# Altium PCB x-IMU3-SA-Haptic.PcbDoc
Units mm, origin at the board's own origin, x right, y up, seen from the top; angles counter-clockwise.
Board outline 19 x 14 mm, 4 copper layers (Top Layer, Int1 (GND), Int2 (PWR), Bottom Layer), stack 1.369 mm thick; 18 components, 15 nets, 69 pads, 19 vias.
Unrouted connection lines stored in the file: 5.
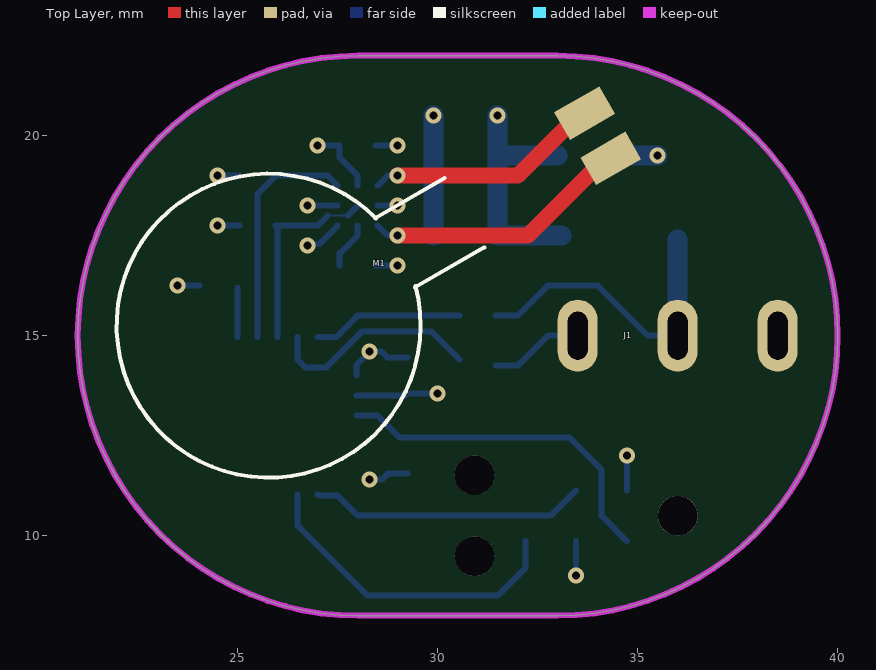
[diagram p0: Top Layer view]
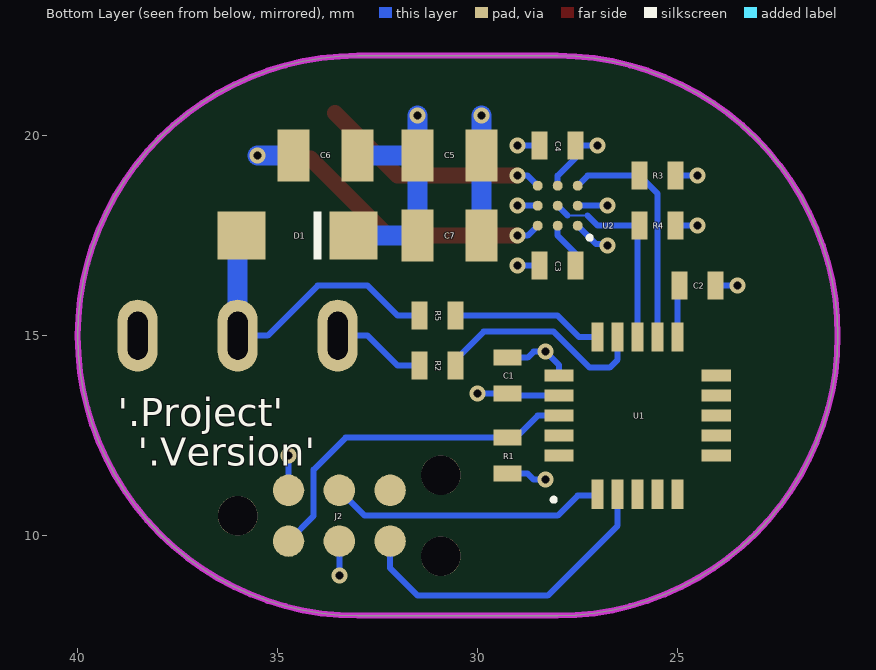
[diagram p1: Bottom Layer view, seen from below]
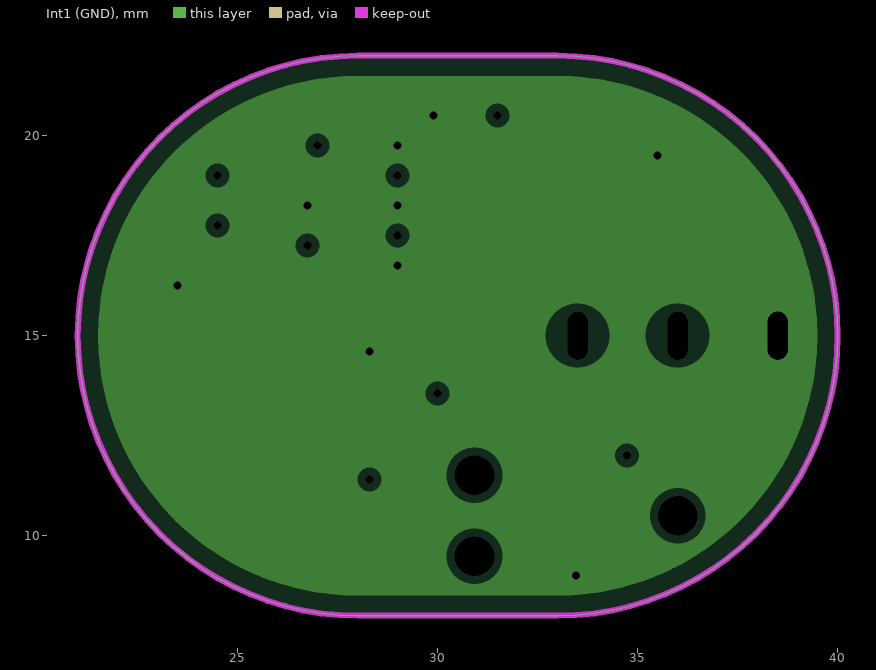
[diagram p2: Int1 (GND), clearances drawn from the general rule]
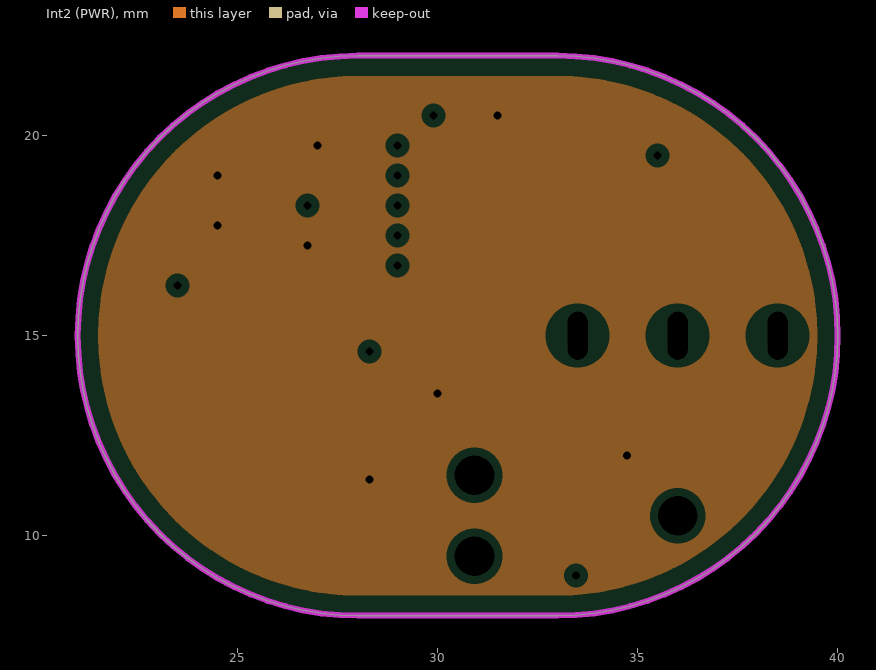
[diagram p3: Int2 (PWR), clearances drawn from the general rule]

## Layer stack, top to bottom
Top Solder: solder mask 0.0254, SM-001, Dk 4
Top Layer: signal copper 0.035
Dielectric 1: prepreg 0.1295, PP-017, Dk 4.3
Dielectric 2: prepreg 0.1295, PP-017, Dk 4.3
Int1 (GND): plane copper 0.035, net GND
Dielectric 3: core 0.7112, Core-039, Dk 4.8
Int2 (PWR): plane copper 0.035, net VDD
Dielectric 4: prepreg 0.1295, PP-017, Dk 4.3
Dielectric 5: prepreg 0.1295, PP-017, Dk 4.3
Bottom Layer: signal copper 0.035
Bottom Solder: solder mask 0.0254, SM-001, Dk 4

## Board outline
28,8 33,8 ccw(c33,15) 33,22 28,22 ccw(c28,15)

## Design rules (kind name [scope] priority, off if disabled: settings)
Clearance ClearanceInternal [OnMid] p1: gap=0.2 ignorepadtopadclearanceinfootprint=FALSE
Clearance [All] p2: gap=0.1 ignorepadtopadclearanceinfootprint=FALSE except(0: Arc-Hole Track-Hole SMDPad-Hole THPad-Hole Via-Hole Fill-Hole Poly-Hole Region-Hole Text-Hole)
DiffPairsRouting [All] p1: maxlimit=0.254 minlimit=0.1 mostfreqgap=0.1 toplayer_minwidth=0.1 toplayer_maxwidth=0.381 toplayer_prefwidth=0.1 bottomlayer_minwidth=0.1 bottomlayer_maxwidth=0.381 bottomlayer_prefwidth=0.1 maxuncoupledlength=12.7
HoleSize [All] p1: absolutevalues=TRUE maxlimit=10 minlimit=0.025 maxpercent=80.000 minpercent=20.000
MinimumSolderMaskSliver [All] p1: minsoldermaskwidth=0
PlaneClearance [All] p1: clearance=0.2
PlaneConnect [All] p1: planeconnectstyle=Direct reliefexpansion=0.508 reliefentries=4 reliefconductorwidth=0.254 reliefairgap=0.254
PolygonConnect [All] p1: thpad.connectstyle=Relief thpad.reliefconductorwidth=0.254 thpad.reliefentries=4 thpad.polygonreliefangle="90 Angle" thpad.airgapwidth=0.1 smdpad.connectstyle=Relief smdpad.reliefconductorwidth=0.254 smdpad.reliefentries=4 smdpad.polygonreliefangle="90 Angle" smdpad.airgapwidth=0.1 via.connectstyle=Direct via.reliefconductorwidth=0.254 via.reliefentries=4 via.polygonreliefangle="90 Angle" via.airgapwidth=0.254
RoutingVias [All] p1: holewidth=0.711 width=1.27 viastyle="Through Hole" minholewidth=0.15 minwidth=0.35 maxholewidth=0.711 maxwidth=1.27
SilkToSolderMaskClearance [IsPad] p1: minsilkscreentomaskgap=0.1 clearancetoexposedcopper=TRUE
SolderMaskExpansion [All] p1: expansion=0.102 istentingtop=FALSE
SupplyNets "Schematic Supply Nets_1" [InNet('VDD')] p1: voltage=0.000
SupplyNets "Schematic Supply Nets" [InNet('GND')] p2: voltage=0.000
Width [All] p1: maxlimit=1 minlimit=0.05 preferedwidth=0.1
24 further rules are at their usual default settings.

## Components (designator, comment, footprint, x,y, rotation, side; value= is the part's Value field where it differs from the comment)
C1 "100nF" "Capacitor 0402" 29.25,14 r270 bottom
C2 "10uF" "Capacitor 0402" 24.5,16.25 r0 bottom
C3 "1uF" "Capacitor 0402" 28,16.75 r180 bottom
C4 "1uF" "Capacitor 0402" 28,19.75 r180 bottom
C5 "47uF" "Capacitor 0805" 30.7,19.5 r0 bottom
C6 "47uF" "Capacitor 0805" 33.8,19.5 r180 bottom
C7 "47uF" "Capacitor 0805" 30.7,17.5 r0 bottom
D1 "PMEG2010ER115" SOD-123 34.5,17.5 r180 bottom
J1 "SP-3533-02" SP-3533-02 36,15 r180 top
J2 "DNP" "Tag Connect No Legs" 36,10.5 r180 bottom
M1 "VG0832014L" VG0832014L 34,20 r30 top
R1 "10kR" "Resistor 0402" 29.25,12 r270 bottom
R2 "470R" "Resistor 0402" 31,14.25 r180 bottom
R3 "2.2kR" "Resistor 0402" 25.5,19 r180 bottom
R4 "2.2kR" "Resistor 0402" 25.5,17.75 r180 bottom
R5 "470R" "Resistor 0402" 31,15.5 r180 bottom
U1 "PIC32MM0064GPL020-I/ML" QFN-20 26,13 r90 bottom
U2 "DRV2605LYZF" DRV2605LYZF 28,18.25 r0 bottom

## Footprints (in the part's own frame and the unit in brackets; to place one, negate y for a bottom-side part, rotate by r counter-clockwise, add the part's x,y. Pads: shape width x height; smd on the part's side, far side on the other; paste and mask are expansions set on the pad)
"Capacitor 0402" [mm]
  rect 0.4x0.7 smd: 1(-0.45,0) 2(0.45,0)
  body extent -0.5,-0.25 0.5,0.25, height 0.48
"Capacitor 0805" [mm]
  rect 0.8x1.3 smd: 1(-0.8,0) 2(0.8,0)
  body extent -1,-0.6 1,0.6, height 0.93
DRV2605LYZF [mm]
  round 0.25 smd: A1(-0.5,0.5) A2(0,0.5) A3(0.5,0.5) B1(-0.5,0) B2(0,0) B3(0.5,0) C1(-0.5,-0.5) C2(0,-0.5) C3(0.5,-0.5)
  silkscreen extent -0.85,0.75 -0.75,0.85, body extent -0.72,-0.72 0.72,0.72, height 0.63
QFN-20 [mm]
  rect 0.73x0.3 smd: 1(-1.965,1) 2(-1.965,0.5) 3(-1.965,0) 4(-1.965,-0.5) 5(-1.965,-1) 11(1.965,-1) 12(1.965,-0.5) 13(1.965,0) 14(1.965,0.5) 15(1.965,1)
  rect 0.3x0.73 smd: 6(-1,-1.965) 7(-0.5,-1.965) 8(0,-1.965) 9(0.5,-1.965) 10(1,-1.965) 16(1,1.965) 17(0.5,1.965) 18(0,1.965) 19(-0.5,1.965) 20(-1,1.965)
  silkscreen extent -2.15,2.05 -2.05,2.15, body extent -2.02,-2.02 2.02,2.02, height 0.8
"Resistor 0402" [mm]
  rect 0.4x0.7 smd: 1(-0.45,0) 2(0.45,0)
  body extent -0.5,-0.25 0.5,0.25, height 0.34
SOD-123 [mm]
  rect 1.2x1.2 smd: A(-1.4,0) K(1.4,0)
  silkscreen extent 0.4,-0.6 0.6,0.6, body extent -1.95,-0.9 1.95,0.9, height 1.18
SP-3533-02 [mm]
  oval 1x1.8 hole 0.5 slot 1.2 at 90 deg: R(0,0) S(-2.5,0) T(2.5,0)
  body extent -21.85,-2.5 4.75,2.5, height 5
"Tag Connect No Legs" [mil]
  round 31 smd paste-99999: 1(50,-25) 2(50,25) 3(100,-25) 4(100,25) 5(150,-25) 6(150,25)
  round 39 hole 39 unplated: Pin(0,0) Pin(200,-40) Pin(200,40)
VG0832014L [mm]
  rect 1.3x0.8 smd: 1(0,0.655) 2(0,-0.655)
  silkscreen extent -13.3,-3.8 -3.85,3.8, body extent -13.5,-4 0.5,4, height 3.25

## Part data
C1 C2 C3 C4 C5 C6 C7: library part Capacitor
D1: library part Diode
J2: library part "MPLAB ICSP"
R1 R2 R3 R4 R5: library part Resistor

## Via types
v1: diameter 0.4, hole 0.2, Top Layer to Bottom Layer, tented both sides, 19 vias

## Nets (pads, with @x,y where several pads share a name; then routed paths per layer and width w, separated by ;. In a path a pad name is that pad's centre, name@x,y a point inside that pad or via, vN(x,y) a via of type N, cw(c..) or ccw(c..) an arc to the next point about the centre after c; other vN are vias at no path point)
GND: C1.1 C2.1 C3.1 C4.1 C5.1 C6.1 C7.1 J1.S J2.3 U1.16 U2.B1 U2.B3 | length 9.4
  Bottom Layer w0.15: v1(23.5,16.25) C2.1 ; v1(26.75,18.25) U2.B1 ; U1.16 27.965,14.265 v1(28.3,14.6) 28.6,14.6 28.75,14.45 C1.1 ; C3.1 v1(29,16.75) ; C4.1 v1(29,19.75) ; U2.B3 v1(29,18.25) ; v1(33.46,9) J2.3
  Bottom Layer w0.5: C7.1 C5.1 v1(29.9,20.5) ; C6.1 v1(35.5,19.5)
MCLR: J2.1 R1.1 U1.18 | length 8.7
  Bottom Layer w0.15: U1.18 28.5,13 29.05,12.45 R1.1 33.3,12.45 34.1,11.65 34.1,10.495 J2.1
OUT+: M1.2 U2.A3 | length 6.6
  Top Layer w0.4: v1(29,17.5) 32.25,17.5 M1.2@34.183,19.433
  Bottom Layer w0.15: U2.A3 28.75,17.5 v1(29,17.5)
OUT-: M1.1 U2.C3 | length 5.8
  Top Layer w0.4: v1(29,19) 32,19 M1.1@33.567,20.567
  Bottom Layer w0.15: U2.C3 28.75,19 v1(29,19)
PGEC: J2.5 U1.2 | length 8.2
  Bottom Layer w0.15: U1.2 26.5,10.25 28.25,8.5 31.5,8.5 32.19,9.19 J2.5
PGED: J2.4 U1.1 | length 6.9
  Bottom Layer w0.15: U1.1 27.035,11 27.5,11 28,10.5 32.825,10.5 J2.4
REG: C3.2 U2.A2 | length 1.2
  Bottom Layer w0.15: C3.2 27.55,17.05 28,17.5 U2.A2
RX: R5.2 U1.15 | length 3.8
  Bottom Layer w0.15: U1.15 27.465,14.965 28,15.5 R5.2
"RX R": D1.A J1.R R5.1 | length 7.8
  Bottom Layer w0.15: R5.1 32,15.5 32.75,16.25 34,16.25 35.25,15 J1.R
  Bottom Layer w0.5: J1.R D1.A@36,17.4
SCL: R3.1 U1.12 U2.C1 | length 5.9
  Bottom Layer w0.15: U1.12 25.5,18.55 R3.1 27.25,19 U2.C1
SDA: R4.1 U1.13 U2.B2 | length 5.1
  Bottom Layer w0.05: 27.25,18 27.75,18
  Bottom Layer w0.15: U1.13 26,17.7 R4.1 27,17.75 27.25,18 ; 27.75,18 U2.B2
TX: R2.2 U1.14 | length 5.4
  Bottom Layer w0.15: U1.14 26.5,14.4 26.7,14.2 27.2,14.2 28.1,15.1 29.85,15.1 R2.2@30.55,14.4
"TX R": J1.T R2.1 | length 2.4
  Bottom Layer w0.15: R2.1 32,14.25 32.75,15 J1.T
VCAP: C2.2 U1.11 | length 1.2
  Bottom Layer w0.15: U1.11 C2.2@25,16.2
VDD: C1.2 C4.2 C5.2 C6.2 C7.2 D1.K J2.2 R1.2 R3.2 R4.2 U1.17 U2.A1 U2.C2 | length 13.8
  Bottom Layer w0.15: v1(24.5,17.75) R4.2 ; v1(24.5,19) R3.2 ; v1(26.75,17.25) 26.798,17.298 27.048,17.298 U2.A1 ; v1(27,19.75) C4.2 27.55,19.45 28,19 U2.C2 ; U1.17 C1.2@29.2,13.5 ; v1(28.3,11.4) 28.6,11.4 28.75,11.55 R1.2 ; C1.2 v1(30,13.55) ; J2.2 v1(34.73,12)
  Bottom Layer w0.5: v1(31.5,20.5) C5.2 ; C6.2 C5.2 ; D1.K C7.2 C5.2
pads on no net: J2.6 J2.Pin U1.3 U1.4 U1.5 U1.6 U1.7 U1.8 U1.9 U1.10 U1.19 U1.20

## Polygon pours and split planes (outlines as drawn)
GND on Int1 (GND) (split plane): 28,21.49 33,21.49 33.017,21.491 33.34,21.483 33.679,21.456 34.016,21.412 34.35,21.35 34.68,21.27 35.006,21.174 35.326,21.061 35.64,20.93 35.947,20.784 36.246,20.622 36.536,20.444 36.816,20.252 37.085,20.045 37.344,19.824 37.59,19.59 37.824,19.344 38.045,19.085 38.252,18.816 38.444,18.536 38.622,18.246 38.784,17.947 38.93,17.64 39.061,17.326 39.174,17.006 39.27,16.68 39.35,16.35 39.412,16.016 39.456,15.679 39.483,15.34 39.492,15 39.483,14.66 39.456,14.321 39.412,13.984 39.35,13.65 39.27,13.32 39.174,12.994 39.061,12.674 38.93,12.36 38.784,12.053 38.622,11.754 38.444,11.464 38.252,11.184 38.045,10.915 37.824,10.656 37.59,10.41 37.344,10.176 37.085,9.955 36.816,9.748 36.536,9.556 36.246,9.378 35.947,9.216 35.64,9.07 35.326,8.939 35.006,8.826 34.68,8.73 34.35,8.65 34.016,8.588 33.679,8.544 33.34,8.517 33.017,8.509 33,8.51 28,8.51 27.983,8.509 27.66,8.517 27.321,8.544 26.984,8.588 26.65,8.65 26.32,8.73 25.994,8.826 25.674,8.939 25.36,9.07 25.053,9.216 24.754,9.378 24.464,9.556 24.184,9.748 23.915,9.955 23.656,10.176 23.41,10.41 23.176,10.656 22.955,10.915 22.748,11.184 22.556,11.464 22.378,11.754 22.216,12.053 22.07,12.36 21.939,12.674 21.826,12.994 21.73,13.32 21.65,13.65 21.588,13.984 21.544,14.321 21.517,14.66 21.508,15 21.517,15.34 21.544,15.679 21.588,16.016 21.65,16.35 21.73,16.68 21.826,17.006 21.939,17.326 22.07,17.64 22.216,17.947 22.378,18.246 22.556,18.536 22.748,18.816 22.955,19.085 23.176,19.344 23.41,19.59 23.656,19.824 23.915,20.045 24.184,20.252 24.464,20.444 24.754,20.622 25.053,20.784 25.36,20.93 25.674,21.061 25.994,21.174 26.32,21.27 26.65,21.35 26.984,21.412 27.321,21.456 27.66,21.483 27.983,21.491
VDD on Int2 (PWR) (split plane): 28,21.49 33,21.49 33.017,21.491 33.34,21.483 33.679,21.456 34.016,21.412 34.35,21.35 34.68,21.27 35.006,21.174 35.326,21.061 35.64,20.93 35.947,20.784 36.246,20.622 36.536,20.444 36.816,20.252 37.085,20.045 37.344,19.824 37.59,19.59 37.824,19.344 38.045,19.085 38.252,18.816 38.444,18.536 38.622,18.246 38.784,17.947 38.93,17.64 39.061,17.326 39.174,17.006 39.27,16.68 39.35,16.35 39.412,16.016 39.456,15.679 39.483,15.34 39.492,15 39.483,14.66 39.456,14.321 39.412,13.984 39.35,13.65 39.27,13.32 39.174,12.994 39.061,12.674 38.93,12.36 38.784,12.053 38.622,11.754 38.444,11.464 38.252,11.184 38.045,10.915 37.824,10.656 37.59,10.41 37.344,10.176 37.085,9.955 36.816,9.748 36.536,9.556 36.246,9.378 35.947,9.216 35.64,9.07 35.326,8.939 35.006,8.826 34.68,8.73 34.35,8.65 34.016,8.588 33.679,8.544 33.34,8.517 33.017,8.509 33,8.51 28,8.51 27.983,8.509 27.66,8.517 27.321,8.544 26.984,8.588 26.65,8.65 26.32,8.73 25.994,8.826 25.674,8.939 25.36,9.07 25.053,9.216 24.754,9.378 24.464,9.556 24.184,9.748 23.915,9.955 23.656,10.176 23.41,10.41 23.176,10.656 22.955,10.915 22.748,11.184 22.556,11.464 22.378,11.754 22.216,12.053 22.07,12.36 21.939,12.674 21.826,12.994 21.73,13.32 21.65,13.65 21.588,13.984 21.544,14.321 21.517,14.66 21.508,15 21.517,15.34 21.544,15.679 21.588,16.016 21.65,16.35 21.73,16.68 21.826,17.006 21.939,17.326 22.07,17.64 22.216,17.947 22.378,18.246 22.556,18.536 22.748,18.816 22.955,19.085 23.176,19.344 23.41,19.59 23.656,19.824 23.915,20.045 24.184,20.252 24.464,20.444 24.754,20.622 25.053,20.784 25.36,20.93 25.674,21.061 25.994,21.174 26.32,21.27 26.65,21.35 26.984,21.412 27.321,21.456 27.66,21.483 27.983,21.491

## Keep-outs
Keep-Out Layer:
  the board outline again, w0.15

## Silkscreen, mask and mechanical layers (free items; w line width, h text height)
Bottom Overlay:
  text "'.Project'" at 39,12.5 h1.2
  text "'.Version'" at 38.5,11.513 h1.2